# Altium PCB PCB1.PcbDoc
Units mil, origin at the board's own origin, x right, y up, seen from the top; angles counter-clockwise.
Board outline 3869.51 x 2952.96 mil, 2 copper layers (Top Layer, Bottom Layer); 113 components, 100 nets, 369 pads, 82 vias.
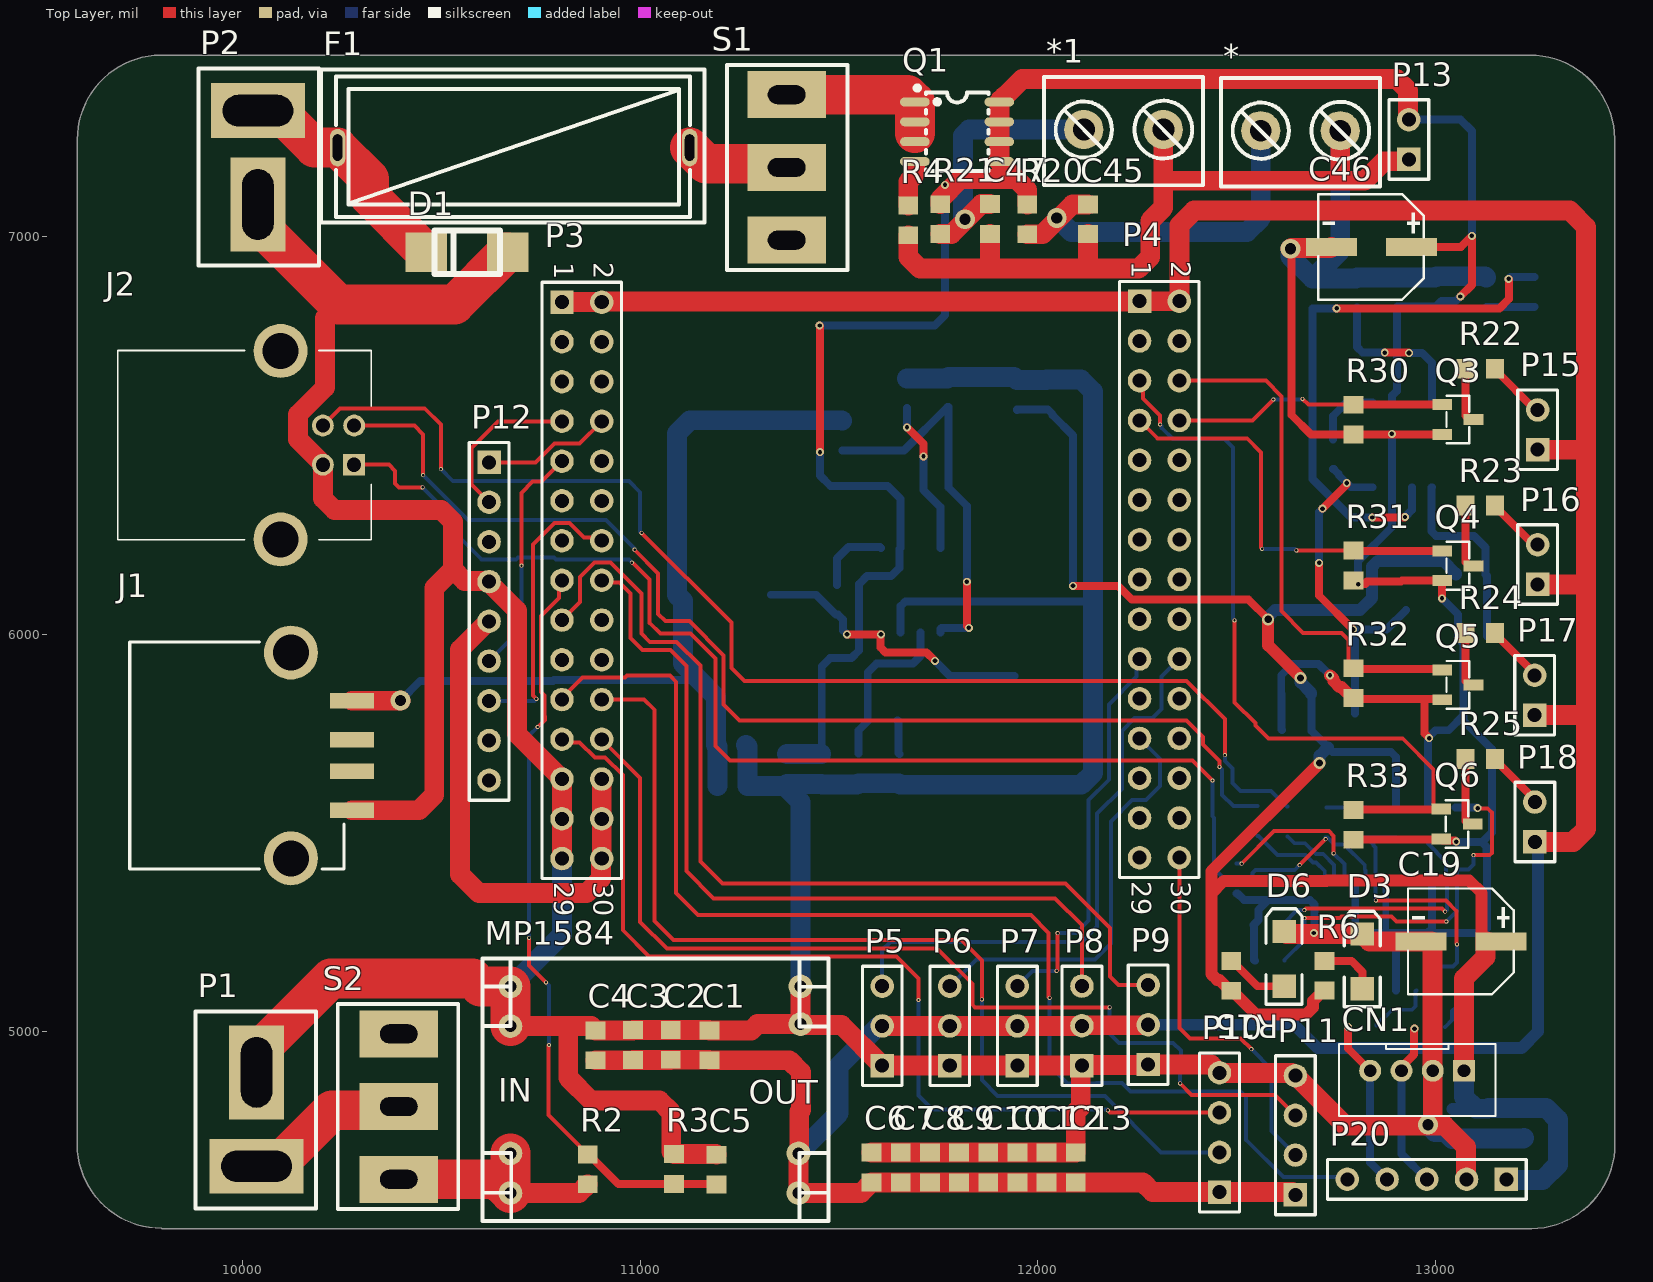
[diagram p0: Top Layer view]
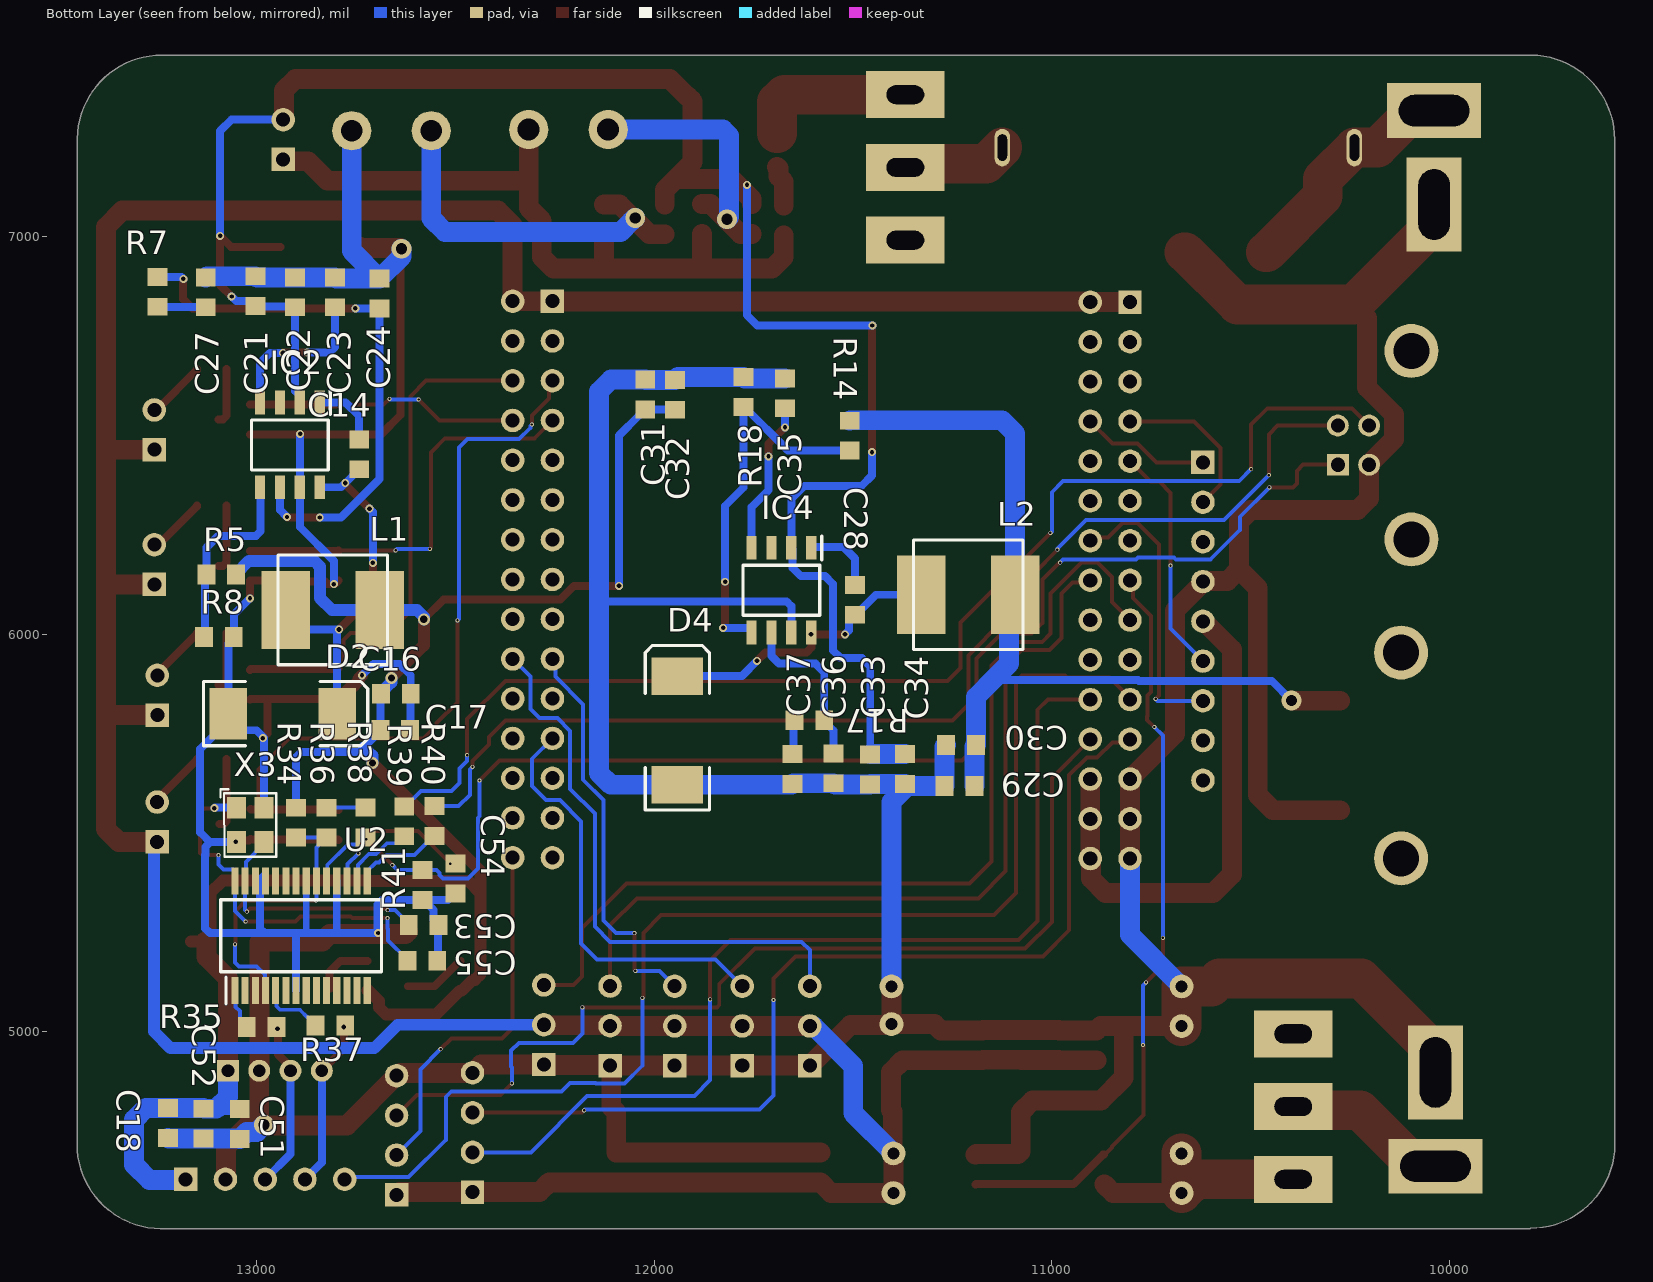
[diagram p1: Bottom Layer view, seen from below]

## Layer stack, top to bottom
Top Solder: solder mask 0.4, Solder Resist, Dk 3.5
Top Layer: signal copper 1.4
Dielectric 1: dielectric 12.6, FR-4, Dk 4.8
Bottom Layer: signal copper 1.4
Bottom Solder: solder mask 0.4, Solder Resist, Dk 3.5

## Board outline
9582.58,4715.48 9582.58,7244.12 9583.34,7244.88 cw(c9796.06,7244.88) 9793.03,7457.58 13238.21,7457.58 13238.58,7457.21 cw(c13238.58,7244.49) 13451.28,7247.52 13451.28,4718.13 13452.09,4717.32 cw(c13239.37,4717.32) 13242.4,4504.62 9796.44,4504.62 9795.28,4505.78 cw(c9795.28,4718.5)

## Design rules (kind name [scope] priority, off if disabled: settings)
Clearance [All] p1: gap=5 ignorepadtopadclearanceinfootprint=TRUE
ComponentClearance [All] p1: gap=0 collisioncheckmode=3 verticalgap=0 showdistances=FALSE
Height [All] p1: minheight=0 maxheight=10000 prefheight=500
HoleSize [All] p1: absolutevalues=TRUE maxlimit=1000 minlimit=1 maxpercent=80.000 minpercent=20.000
HoleToHoleClearance [All] p1: gap=5 allowstackedmicrovias=TRUE
MinimumSolderMaskSliver [All] p1: minsoldermaskwidth=0
PolygonConnect [All] p1: connectstyle=Relief reliefconductorwidth=10 reliefentries=4 polygonreliefangle="90 Angle" airgapwidth=10
RoutingVias [All] p1: holewidth=6 width=10 viastyle="Through Hole" minholewidth=0 minwidth=0 maxholewidth=40 maxwidth=50
SilkToSilkClearance [All] p1: silktosilkclearance=0
SilkToSolderMaskClearance [IsPad] p1: minsilkscreentomaskgap=0 clearancetoexposedcopper=TRUE
SolderMaskExpansion [All] p1: expansion=4 istentingtop=FALSE
UnRoutedNet [All] p1: checkbadconnections=TRUE
Width [All] p1: maxlimit=200 minlimit=10 preferedwidth=10
22 further rules are at their usual default settings.

## Components (designator, comment, footprint, x,y, rotation, side; value= is the part's Value field where it differs from the comment)
* "电源接线柱" 接线柱 12653.94,7266.14 r90 top
*1 "电源接线柱" 接线柱 12208.66,7268.9 r90 top
C1 "C" 0805 11173.62,4968.5 r90 top
C2 "C" 0805 11076.51,4969.68 r90 top
C3 "C" 0805 10981.89,4969.29 r90 top
C4 "C" 0805 10887.01,4968.5 r90 top
C5 "C" 0805 11191.34,4650.79 r270 top
C6 "C" 0805 11581.8,4656.3 r270 top
C7 "C" 0805 11655.15,4656.3 r270 top
C8 "C" 0805 11728.5,4656.3 r270 top
C9 "C" 0805 11801.86,4656.3 r270 top
C10 "C" 0805 11875.21,4656.3 r270 top
C11 "C" 0805 11948.57,4656.3 r270 top
C12 "C" 0805 12021.92,4656.3 r270 top
C13 "C" 0805 12095.28,4656.3 r270 top
C14 "C" 0805 12742.13,6455.51 r90 bottom
C16 "C" 0805 12652.36,5850.39 r0 bottom
C17 "C" 0805 12653.94,5759.45 r0 bottom
C18 "C" 0805 13223.23,4773.23 r90 bottom
C19 "10uF" CAP-SMD_BD6.3-L6.6-W6.6-RD 13064.96,5227.56 r0 top
C21 "C" 0805 13002.76,6861.02 r270 bottom
C22 "C" 0805 12903.54,6857.87 r270 bottom
C23 "C" 0805 12803.07,6857.87 r270 bottom
C24 "C" 0805 12690.94,6855.12 r270 bottom
C27 "C" 0805 13128.35,6857.87 r270 bottom
C28 "C" 0805 11494.49,6089.37 r90 bottom
C29 "C" 0805 11229.09,5618.23 r180 bottom
C30 "C" 0805 11225.59,5721.65 r180 bottom
C31 "C" 0805 12022.44,6601.18 r270 bottom
C32 "C" 0805 11947.24,6600 r270 bottom
C33 "C" 0805 11456.69,5662.2 r90 bottom
C34 "C" 0805 11368.5,5663.78 r90 bottom
C35 "C" 0805 11670.47,6603.94 r270 bottom
C36 "C" 0805 11548.43,5665.35 r90 bottom
C37 "C" 0805 11651.57,5663.78 r90 bottom
C45 "C" 0805 12125.98,7046.85 r90 top
C46 "10uF" CAP-SMD_BD6.3-L6.6-W6.6-RD 12838.98,6974.8 r0 top
C47 "C" 0805 11879.92,7047.64 r90 top
C51 "C" 0805 13042.52,4770.51 r90 bottom
C52 "C" 0805 13133.86,4771.26 r90 bottom
C53 "C" 0805 12577.56,5268.5 r180 bottom
C54 "C" 0805 12500,5388.19 r90 bottom
C55 "C" 0805 12580.87,5178.74 r180 bottom
CN1 "PH2.0-4P" CONN-TH_PH2.0-4P 12954.33,4901.97 r180 top
D1 "D-SS12" SMA 10557.48,6969.29 r0 top
D2 "Diode" SMC 12934.25,5800.39 r180 bottom
D3 "LED2" 3.2X1.6X1.1 12816.14,5177.17 r90 top
D4 "Diode" SMC 11941.73,5758.27 r90 bottom
D6 "LED2" 3.2X1.6X1.1 12619.68,5183.46 r90 top
F1 "Fuse transparent seat" FUSE-TH_L24.5-W9.8-P22.5 10681.1,7224.8 r0 top
IC2 "TPS54231D" SOIC127P600X175-8N 12916.54,6476.77 r270 bottom
IC4 "TPS54231D" SOIC127P600X175-8N 11679.92,6111.02 r270 bottom
J1 "A-USBA_SMT-R" AUSBASMTR 9994.88,5695.28 r270 top
J2 "USB-B-S-F-B-TH" USBBSFBTH 10279.92,6426.77 r270 top
L1 "L" L-7*7 12808.66,6061.42 r180 bottom
L2 "L" L-7*7 11209.84,6099.61 r180 bottom
MP1584 "MP1584EN_module" MP1584EN_module 10992.91,4799.21 r0 top
P1 "P" T插1 10034.25,4661.81 r90 top
P2 "P" T插1 10037.8,7317.72 r270 top
P3 "Header 15X2" HDR2X15 10802.76,6835.83 r270 top
P4 "Header 15X2" HDR2X15 12255.91,6838.19 r270 top
P5 "SERVO" HDR1X3 11608.43,4914.76 r90 top
P6 "SERVO" HDR1X3 11778.43,4914.76 r90 top
P7 "SERVO" HDR1X3 11948.43,4914.76 r90 top
P8 "SERVO" HDR1X3 12111.02,4914.96 r90 top
P9 "SERVO" HDR1X3 12277.56,4917.72 r90 top
P10 "SCI" HDR1X4 12457.05,4596.65 r90 top
P11 "IIC" HDR1X4 12648.03,4589.76 r90 top
P12 "PS2" HDR1X9 10619.29,6432.68 r270 top
P13 "Header 2" HDR1X2 12933.46,7194.88 r90 top
P15 "B_LED1" HDR1X2 13257.48,6464.57 r90 top
P16 "B_LED2" HDR1X2 13257.48,6125.59 r90 top
P17 "F_LED1" HDR1X2 13250,5796.85 r90 top
P18 "F_LED2" HDR1X2 13250.39,5477.95 r90 top
P20 "Header 5" HDR1X5 13178.74,4628.74 r180 top
Q1 "AO4411_C709889" SO-8_L4.9-W3.9-P1.27-LS5.9-BL 11796.85,7264.57 r270 top
Q3 "AO3400_C181090" SOT-23-3_L2.9-W1.3-P1.90-LS2.4-BR 13056.69,6540.55 r180 top
Q4 "AO3400_C181090" SOT-23-3_L2.9-W1.3-P1.90-LS2.4-BR 13056.69,6172.44 r180 top
Q5 "AO3400_C181090" SOT-23-3_L2.9-W1.3-P1.90-LS2.4-BR 13056.69,5872.83 r180 top
Q6 "AO3400_C181090" SOT-23-3_L2.9-W1.3-P1.90-LS2.4-BR 13054.72,5522.83 r180 top
R2 "R" 0805 10867.72,4651.57 r270 top
R3 "R" 0805 11084.25,4652.36 r270 top
R4 "R" 0805 11674.02,7038.98 r270 top
R5 "R" 0805 13086.61,6150.39 r180 bottom
R6 "R" 0805 12720.87,5138.58 r270 top
R7 "R" 0805 13249.61,6864.17 r90 bottom
R8 "R" 0805 13097.64,5992.91 r0 bottom
R14 "R" 0805 11507.87,6502.36 r90 bottom
R15 "R" 0805 12486.61,5138.19 r270 top
R17 "R" 0805 11607.09,5783.86 r180 bottom
R18 "R" 0805 11775.59,6607.48 r270 bottom
R20 "R" 0805 11973.23,7041.73 r270 top
R21 "R" 0805 11754.33,7042.13 r270 top
R22 "R" 0805 13110.63,6668.11 r180 top
R23 "R" 0805 13110.63,6324.41 r180 top
R24 "R" 0805 13110.63,6003.54 r180 top
R25 "R" 0805 13110.63,5686.61 r180 top
R30 "R" 0805 12794.09,6537.8 r270 top
R31 "R" 0805 12794.09,6170.47 r270 top
R32 "R" 0805 12794.09,5874.8 r270 top
R33 "R" 0805 12794.09,5518.11 r270 top
R34 "0R" 0805 12901.57,5528.74 r90 bottom
R35 "22R" 0805 12990,5011.81 r0 bottom
R36 "NC" 0805 12824.41,5528.74 r90 bottom
R37 "22R" 0805 12817.32,5016.14 r0 bottom
R38 "4.7K" 0805 12726.38,5529.13 r90 bottom
R39 "22R" 0805 12628.74,5531.89 r90 bottom
R40 "22R" 0805 12552.36,5532.68 r90 bottom
R41 "10K" 0805 12582.68,5372.05 r90 bottom
S1 "SWITCH" 纽子开关 11368.11,7172.8 r180 top
S2 "SWITCH" 纽子开关 10392.13,4813.78 r0 top
U2 "FT232RL" SOP65P778X200-28N 12888.19,5241.73 r90 bottom
X3 "12MHz" OSC-SMD_4P-L3.2-W2.5-BL 13016.14,5520.47 r270 bottom

## Footprints (in the part's own frame and the unit in brackets; to place one, negate y for a bottom-side part, rotate by r counter-clockwise, add the part's x,y. Pads: shape width x height; smd on the part's side, far side on the other; paste and mask are expansions set on the pad)
3.2X1.6X1.1 [mm] "SMT LED; 2 Flat Leads"
  rect 1.5x1.5 smd: 1(-1.75,0) 2(1.75,0)
  silkscreen extent -2.9,-1.15 3.2,1.15
0805 [mil]
  rect 45x50 smd: 1(-40,0) 2(35,0)
AUSBASMTR [mm]
  rect 1x2.8 smd: 1(-3.5,7.1) 2(-1,7.1) 3(1,7.1) 4(3.5,7.1)
  round 3.45 hole 2.3: MH1(-6.57,3.2) MH2(6.57,3.2)
  silkscreen extent -7.25,-7.1 7.25,6.6, body extent -7.61,-7.1 7.62,8.4, height 7.22
CAP-SMD_BD6.3-L6.6-W6.6-RD [mm]
  rect 3.26x1.15 smd: 1(2.555,0) 2(-2.555,0)
  silkscreen extent -3.39,-3.38 3.36,3.38
CONN-TH_PH2.0-4P [mm]
  rect 1.4x1.4 hole 0.813: 1(-3,0)
  round 1.4 hole 0.813: 2(-1,0) 3(1,0) 4(3,0)
  silkscreen extent -5,-1.7 5,2.9
FUSE-TH_L24.5-W9.8-P22.5 [mm]
  oval 1x2.4 hole 0.6 slot 1.68 at 90 deg: 1(-11.25,0) 2(11.25,0)
  silkscreen extent -12.3,-4.8 12.2,5
HDR1X2 [mm] "Connector; Header; 2 Position"
  rect 1.5x1.5 hole 0.9: 1(0,0)
  round 1.5 hole 0.9: 2(2.54,0)
  silkscreen extent -1.27,-1.27 3.81,1.27
HDR1X3 [mm] "Connector; Header; 3 Position"
  rect 1.5x1.5 hole 0.9: 1(0,0)
  round 1.5 hole 0.9: 2(2.54,0) 3(5.08,0)
  silkscreen extent -1.27,-1.27 6.35,1.27
HDR1X4 [mm] "Connector; Header; 4 Position"
  rect 1.5x1.5 hole 0.9: 1(0,0)
  round 1.5 hole 0.9: 2(2.54,0) 3(5.08,0) 4(7.62,0)
  silkscreen extent -1.27,-1.27 8.89,1.27
HDR1X5 [mm] "Connector; Header; 5 Position"
  rect 1.5x1.5 hole 0.9: 1(0,0)
  round 1.5 hole 0.9: 2(2.54,0) 3(5.08,0) 4(7.62,0) 5(10.16,0)
  silkscreen extent -1.27,-1.27 11.43,1.27
HDR1X9 [mm] "Connector; Header; 9 Position"
  rect 1.5x1.5 hole 0.9: 1(0,0)
  round 1.5 hole 0.9: 2(2.54,0) 3(5.08,0) 4(7.62,0) 5(10.16,0) 6(12.7,0) 7(15.24,0) 8(17.78,0) 9(20.32,0)
  silkscreen extent -1.27,-1.27 21.59,1.27
HDR2X15 [mm] "Connector; Header; 15x2 Position"
  rect 1.5x1.5 hole 0.9: 1(0,0)
  round 1.5 hole 0.9: 2(0,2.54) 3(2.54,0) 4(2.54,2.54) 5(5.08,0) 6(5.08,2.54) 7(7.62,0) 8(7.62,2.54) 9(10.16,0) 10(10.16,2.54) 11(12.7,0) 12(12.7,2.54) 13(15.24,0) 14(15.24,2.54) 15(17.78,0) 16(17.78,2.54) 17(20.32,0) 18(20.32,2.54) 19(22.86,0) 20(22.86,2.54) 21(25.4,0) 22(25.4,2.54) 23(27.94,0) 24(27.94,2.54) 25(30.48,0) 26(30.48,2.54) 27(33.02,0) 28(33.02,2.54) 29(35.56,0) 30(35.56,2.54)
  silkscreen extent -1.27,-1.27 36.83,3.81
L-7*7 [mm]
  rect 3.1x5 smd: 1(-3,0) 2(3,0)
  silkscreen extent -3.5,-3.5 3.5,3.5, body extent -3.65,-3.65 3.65,3.65, height 4.5
MP1584EN_module [mil]
  round 60 hole 30: 1(-320,315) 2(-320,215) 3(-320,-105) 4(-320,-205) 5(405,-205) 6(405,-105) 7(410,220) 8(410,315)
  silkscreen extent -390,-275 480,385
OSC-SMD_4P-L3.2-W2.5-BL [mm]
  rect 1.4x1.2 smd: 1(-1.1,-0.875) 2(1.1,-0.875) 3(1.1,0.875) 4(-1.1,0.875)
  silkscreen extent -2.29,-1.9 2.03,1.65
SMA [mil]
  rect 105x100 smd: 1(109,-8) 2(-96,-8)
  silkscreen extent -76,-63 89,47
SMC [mm] "DO-214-AB/SMC; 2 C-Bend Leads; Body 7.9 x 5.9 mm, inc. leads (LxW)"
  rect 2.4x3.3 smd: 1(-3.475,0) 2(3.475,0)
  silkscreen extent -5.07,-2.05 5.43,2.05
SO-8_L4.9-W3.9-P1.27-LS5.9-BL [mil]
  oval 22.6x74.33 smd: 1(-75,-106.26) 2(-25,-106.26) 3(25,-106.26) 4(75,-106.26) 5(75,106.26) 6(25,106.26) 7(-25,106.26) 8(-75,106.26)
  silkscreen extent -116,-106 98,79
SOIC127P600X175-8N [mm]
  rect 1.528x0.65 smd: 1(-2.711,1.905) 2(-2.711,0.635) 3(-2.711,-0.635) 4(-2.711,-1.905) 5(2.711,-1.905) 6(2.711,-0.635) 7(2.711,0.635) 8(2.711,1.905)
  silkscreen extent -3.47,-2.45 1.6,2.58, body extent -3.01,-2.45 3.01,2.45, height 1.63
SOP65P778X200-28N [mm]
  rect 1.7x0.45 smd: 1(-3.5,4.225) 2(-3.5,3.575) 3(-3.5,2.925) 4(-3.5,2.275) 5(-3.5,1.625) 6(-3.5,0.975) 7(-3.5,0.325) 8(-3.5,-0.325) 9(-3.5,-0.975) 10(-3.5,-1.625) 11(-3.5,-2.275) 12(-3.5,-2.925) 13(-3.5,-3.575) 14(-3.5,-4.225) 15(3.5,-4.225) 16(3.5,-3.575) 17(3.5,-2.925) 18(3.5,-2.275) 19(3.5,-1.625) 20(3.5,-0.975) 21(3.5,-0.325) 22(3.5,0.325) 23(3.5,0.975) 24(3.5,1.625) 25(3.5,2.275) 26(3.5,2.925) 27(3.5,3.575) 28(3.5,4.225)
  silkscreen extent -4.35,-5.14 2.3,5.14, body extent -3.89,-5.14 3.89,5.14, height 2
SOT-23-3_L2.9-W1.3-P1.90-LS2.4-BR [mm]
  rect 1.25x0.7 smd: 1(1,-0.95) 2(1,0.95) 3(-1,0)
  silkscreen extent -0.73,-1.53 0.73,1.53
T插1 [mm]
  rect 3.5x6 hole 2 slot 4.5 at 90 deg: 1(0,0)
  rect 6x3.5 hole 2 slot 4.5 at 0 deg: 2(6,0)
  silkscreen extent -2.7,-3.8 9.9,3.9
USBBSFBTH [mm]
  rect 1.4x1.4 hole 0.9: 1(0,0)
  round 1.4 hole 0.9: 2(-2.5,0) 3(-2.5,-2) 4(0,-2)
  round 3.45 hole 2.3: MH1(4.77,-4.7) MH2(-7.27,-4.7)
  silkscreen extent -7.3,-15.1 4.8,1.1, body extent -8.31,-15.1 5.82,1.1, height 11.05
接线柱 [mm]
  round 2.5 hole 1.4: 1(0.025,2.362) 2(0.025,-2.718)
  silkscreen extent -3.53,-5.26 3.4,4.9
纽子开关 [mm]
  rect 5x3 hole 1.2 slot 2.4 at 0 deg: 1(0,-4.699) 2(0,-0.051) 3(0,4.597)
  silkscreen extent -3.9,-6.6 3.8,6.5, body extent -5.11,-6.41 5.05,6.31, height 28.55

## Part data
C19 C46: BOM_JLCPCB Part Class="Extended Part", BOM_Manufacturer=CapXon, BOM_Manufacturer Part=ZV100M050E055R, BOM_Supplier=LCSC, BOM_Supplier Part=C65228, nameAlias=Capacitance, spicePre=C, spiceSymbolName=ZV100M050E055R
CN1: BOM_JLCPCB Part Class="Extended Part", BOM_Manufacturer=CAX(创都), BOM_Manufacturer Part=PH2.0-4P, BOM_Supplier=LCSC, BOM_Supplier Part=C722763, Contributor=LCSC, spicePre=C, spiceSymbolName=PH2.0-4P
D2 D4: "Default Diode", Code_JEDEC=DO-214-AB, LatestRevisionDate=17-Jul-2002, LatestRevisionNote="Re-released for DXP Platform.", PackageDescription="DO-214-AB/SMC; 2 C-Bend Leads; Body 7.9 x 5.9 mm, inc. leads (LxW)", PackageReference=SMC, PackageVersion=Sep-1996, Published=8-Jun-2000, Publisher="Altium Limited"
D3 D6: "Typical RED, GREEN, YELLOW, AMBER GaAs LED", LatestRevisionDate=17-Jul-2002, LatestRevisionNote="Re-released for DXP Platform.", PackageDescription="SM LED; 2 Flat Leads", PackageReference=3.2X1.6X1.1, PackageVersion=Feb-2002, Published=8-Jun-2000, Publisher="Altium Limited"
F1: BOM_JLCPCB Part Class="Extended Part", BOM_Manufacturer=ReliaPro, BOM_Manufacturer Part="Fuse transparent seat", BOM_Supplier=LCSC, BOM_Supplier Part=C58066, spicePre=F, spiceSymbolName="Fuse transparent seat"
IC2 IC4: "Integrated Circuit", Manufacturer_Name="Texas Instruments", Mouser Part Number=595-TPS54231D, Arrow Part Number=TPS54231D, Arrow Price/Stock=https://www.arrow.com/en/products/tps54231d/texas-instruments?region=nac, Datasheet Link=http://www.ti.com/lit/ds/symlink/tps54231.pdf, Height=1.75mm, Manufacturer_Part_Number=TPS54231D, Mouser Price/Stock=https://www.mouser.co.uk/ProductDetail/Texas-Instruments/TPS54231D?qs=XGzIaZb%2FFYKgSi6ISxIl1g%3D%3D
J1: "Connector", Manufacturer_Name="ASSMANN WSW components GmbH", Manufacturer_Part_Number=A-USBA/SMT-R, Datasheet Link=https://4donline.ihs.com/images/VipMasterIC/IC/ASMN/ASMN-S-A0006023560/ASMN-S-A0006023560-1.pdf?hkey=EF798316E3902B6ED9A73243A3159BB0, Height=7.12mm
J2: "Connector", Manufacturer_Name=SAMTEC, Mouser Part Number=200-USBBSFBTH, Arrow Part Number=USB-B-S-F-B-TH, Arrow Price/Stock=https://www.arrow.com/en/products/usb-b-s-f-b-th/samtec, Datasheet Link=http://suddendocs.samtec.com/prints/usb-b-s-x-x-th-x-xx-mkt.pdf, Height=10.95mm, Manufacturer_Part_Number=USB-B-S-F-B-TH, Mouser Price/Stock=https://www.mouser.co.uk/ProductDetail/Samtec/USB-B-S-F-B-TH?qs=sVTw84TxZehrVm561Fh59Q%3D%3D
P1 P2: library part CON-T插
P3 P4: "Header, 15-Pin, Dual row", LatestRevisionDate=17-Jul-2002, LatestRevisionNote="Re-released for DXP Platform.", Publisher="Altium Limited"
P5 P6 P7 P8 P9: library part "Header 3", "Header, 3-Pin", LatestRevisionDate=17-Jul-2002, LatestRevisionNote="Re-released for DXP Platform.", Publisher="Altium Limited"
P10 P11: library part "Header 4", "Header, 4-Pin", LatestRevisionDate=17-Jul-2002, LatestRevisionNote="Re-released for DXP Platform.", Publisher="Altium Limited"
P12: library part "Header 9", "Header, 9-Pin", LatestRevisionDate=17-Jul-2002, LatestRevisionNote="Re-released for DXP Platform.", Publisher="Altium Limited"
P13: "Header, 2-Pin", LatestRevisionDate=17-Jul-2002, LatestRevisionNote="Re-released for DXP Platform.", Publisher="Altium Limited"
P15 P16 P17 P18: library part "Header 2", "Header, 2-Pin", LatestRevisionDate=17-Jul-2002, LatestRevisionNote="Re-released for DXP Platform.", Publisher="Altium Limited"
P20: "Header, 5-Pin", LatestRevisionDate=17-Jul-2002, LatestRevisionNote="Re-released for DXP Platform.", Publisher="Altium Limited"
Q1: BOM_JLCPCB Part Class="Extended Part", BOM_Manufacturer="VBsemi Elec", BOM_Manufacturer Part=AO4411, BOM_Supplier=LCSC, BOM_Supplier Part=C709889, Contributor=LCSC, spicePre=Q, spiceSymbolName=AO4411_C709889
Q3 Q4 Q5 Q6: BOM_JLCPCB Part Class="Extended Part", BOM_Manufacturer=Hottech, BOM_Manufacturer Part=AO3400, Add into BOM=Yes, BOM_Supplier=LCSC, BOM_Supplier Part=C181090, Contributor=LCSC, libConvert=Yes, spicePre=Q, spiceSymbolName=AO3400_C181090
R34 R35 R36 R37 R38 R39 R40 R41: library part R
S1 S2: library part SW-钮子开关
U2: "Integrated Circuit", Manufacturer_Name="FTDI Chip", Arrow Part Number=FT232RL, Arrow Price/Stock=https://www.arrow.com/en/products/ft232rl/ftdi-chip, Datasheet Link=http://www.ftdichip.com/Support/Documents/DataSheets/ICs/DS_FT232R.pdf, Height=2mm, Manufacturer_Part_Number=FT232RL
X3: BOM_JLCPCB Part Class="Extended Part", BOM_Manufacturer="ZheJiang East Crystal Elec", BOM_Manufacturer Part=M12000J134, BOM_Supplier=LCSC, BOM_Supplier Part=C258939, Contributor=LCSC, nameAlias=Frequency, spicePre=X, spiceSymbolName=M12000J134
C1 C2 C3 C4 C5 C6 C7 C8 C9 C10 C11 C12 C13 C14 C16 C17 C18 C21 C22 C23 C24 C27 C28 C29 C30 C31 C32 C33 C34 C35 C36 C37 C45 C47 C51 C52 C53 C54 C55: LatestRevisionDate=17-Jul-2002, LatestRevisionNote="Re-released for DXP Platform.", PackageDescription="Radial Cap, Thru-Hole; 2 Leads; 0.3 in Pin Spacing", PackageReference=RAD-0.3, Published=8-Jun-2000, Publisher="Altium Limited"

## Via types
v1: diameter 10, hole 6, Top Layer to Bottom Layer, 41 vias
v2: diameter 20, hole 11, Top Layer to Bottom Layer, 20 vias
v3: diameter 20, hole 12, Top Layer to Bottom Layer, 13 vias
v4: diameter 50, hole 28, Top Layer to Bottom Layer, 5 vias
v5: diameter 30, hole 18, Top Layer to Bottom Layer, 3 vias

## Nets (pads, with @x,y where several pads share a name; then routed paths per layer and width w, separated by ;. In a path a pad name is that pad's centre, name@x,y a point inside that pad or via, vN(x,y) a via of type N, cw(c..) or ccw(c..) an arc to the next point about the centre after c; other vN are vias at no path point)
3V3: P3.26 P3.28 P3.30 P12.5 | length 1308.6
  Top Layer w50: P12.5 10616.84,6032.68 10546.37,5962.2 10546.37,5396.15 10593.7,5348.82 10864.17,5348.82 10901.02,5385.67 10901.02,5434.09 P3.30 P3.28 P3.26
BAT: C21.2 C22.2 C33.2 C34.2 C46.1 IC2.2 IC4.2 P13.2 Q1.5 Q1.6 Q1.7 Q1.8 R20.1 R21.1 | length 4967.6
  Top Layer w20: v2(11451.18,6777.17) 11451.97,6776.38 v2(11451.97,6458.27) ; C46.1 13064.17,6974.8 v2(13092.13,7002.76) 13092.13,6879.21 v2(13062.99,6850.08)
  Top Layer w50: R21.1 11754.33,7094.88 11804.82,7145.37 11945.77,7145.37 ; R20.1 11973.23,7117.91 11945.77,7145.37 ; P13.2 12931.73,7296.61 12931.73,7367.95 12902.44,7397.24 11960.79,7397.24 11916.81,7353.27 11915.28,7353.27 11903.11,7341.1 Q1.8 Q1.7 Q1.6 Q1.5 11903.11,7188.03 11945.77,7145.37
  Bottom Layer w20: v2(11451.18,6777.17) 11740.65,6777.17 11766.42,6802.94 v2(11766.42,7131.1) ; v2(11451.97,6458.27) 11451.97,6399.61 11477.95,6373.62 11622.05,6373.62 11654.92,6340.75 IC4.2 11652.13,6214.96 11652.13,6167.48 11631.1,6146.46 11570.47,6146.46 11550.39,6126.38 11550.39,5959.84 11531.1,5940.55 11477.56,5940.55 11456.3,5919.29 11456.3,5699.96 C33.2@11455.12,5698.78 ; IC2.2 12891.54,6600.79 12903.54,6612.8 C22.2 12905.12,6824.45 13001.18,6824.45 C21.2 13015.26,6838.52 13051.44,6838.52 v2(13062.99,6850.08) ; P13.2 12934.25,7295.67 13062.99,7295.67 13092.13,7266.54 v2(13092.13,7002.76)
  Bottom Layer w50: C34.2 C33.2@11455.12,5698.78
CANH: P4.17
CANL: P4.16
GND: *1.2 *.2 C1.2 C2.2 C3.2 C4.2 C5.1 C6.1 C7.1 C8.1 C9.1 C10.1 C11.1 C12.1 C13.1 C16.1 C17.1 C18.1 C19.2 C21.1 C22.1 C23.1 C24.1 C27.1 C29.1 C30.1 C31.1 C32.1 C33.1 C34.1 C35.1 C36.1 C37.1 C45.1 C46.2 C47.1 C51.1 C52.1 C53.2 C54.1 C55.2 CN1.2 D1.1 D2.1 D3.2 D4.1 D6.2 IC2.7 IC4.7 J1.4 J2.4 MP1584.1 MP1584.2 MP1584.7 MP1584.8 P1.2 P2.2 P3.25 P3.27 P3.29 P5.1 P6.1 P7.1 P8.1 P9.1 P10.4 P11.4 P12.4 P13.1 P20.2 Q3.2 Q4.2 Q5.2 Q6.2 R3.1 R4.2 R8.1 R18.1 R30.2 R31.2 R32.2 R33.2 R41.1 U2.7 U2.18 U2.21 U2.25 U2.26 X3.2 X3.4 | length 21704.1
  Top Layer w20: v4(12635.83,6970.08) 12637.8,6968.11 12637.8,6552.36 12687.36,6502.8 R30.2 12794.27,6502.97 13017.15,6502.97 Q3.2 ; R33.2 12795.26,5484.27 13014.19,5484.27 Q6.2 13019.13,5481.65 13049.45,5481.65 v2(13052.76,5478.35) ; R32.2 12796.28,5837.62 12973.23,5837.62 ; R31.2 12803.2,6126.37 v2(12805.75,6126.37) 12824.72,6126.37 ; 12827.57,6132.84 12913.94,6132.84 12916.35,6135.26 13016.75,6135.26 13016.93,6135.08 v2(13016.93,6090.55) ; v2(12984.65,5738.98) 12973.23,5750.39 12973.23,5837.62 ; Q5.2 13015.14,5837.62 12973.23,5837.62
  Top Layer w30: v2(12735.04,5896.85) 12744.09,5887.8 12744.09,5881.95 12758.74,5867.3 12764.09,5867.3 12791.59,5839.8 R32.2
  Top Layer w50: 10240.16,6829.92 10206.3,6796.06 10206.3,6620.73 10138.62,6553.05 10138.62,6490.72 10201.18,6428.16 J2.4 10201.18,6341.89 10230.47,6312.6 10499.06,6312.6 10528.35,6283.31 10528.35,6163.7 ; J1.4 10442.91,5557.48 10481.5,5596.06 10481.5,6116.85 10528.35,6163.7 ; MP1584.2 10818.5,5014.21 ; P3.29 P3.27 P3.25 10689.61,5748.98 10689.61,6059.91 10619.29,6130.23 P12.4 10617.56,6134.41 10557.64,6134.41 10528.35,6163.7 ; C5.1 11189.76,4692.36 R3.1 11077.56,4699.06 11077.56,4797.48 11048.27,4826.77 10875.98,4826.77 10818.5,4884.25 10818.5,5014.21 ; MP1584.8 MP1584.7 ; C6.1 C7.1 C8.1 C9.1 C10.1 C11.1 C12.1 C13.1 12095.28,4797.76 12107.95,4810.43 12107.95,4911.89 P8.1@12110.93,4914.86 ; R4.2 11674.02,6949.37 11703.31,6920.08 11880.32,6920.08 ; C47.1 11879.92,6920.47 11880.32,6920.08 ; C45.1 12125.98,6920.47 12126.38,6920.08 ; *1.2 12315.66,7141.34 ; D6.2 12625.98,5246.06 D3.2 12834.65,5227.56 C19.2 12990.36,5227.56 12992.72,5225.2 12992.72,4902.95 CN1.2 12993.7,4765.75 v4@12992.52,4764.57 ; v4(12635.83,6970.08) 12638.19,6972.44 12736.02,6972.44 C46.2 ; *.2 12760.94,7142.04 12760.24,7141.34 ; P13.1 12928.94,7190.35 12871.06,7190.35 12822.05,7141.34 12760.24,7141.34 ; P20.2 13077.01,4630.47 13077.01,4710.39 13022.83,4764.57 v4@12992.52,4764.57 ; 10818.5,5014.21 10876.3,5014.21 C4.2 10981.1,5003.5 C3.2 11076.12,5004.29 C2.2 11172.44,5004.68 C1.2 11279.06,5003.5 11294.77,5019.21 MP1584.7 ; MP1584.7 11404.83,5017.3 11505.89,5017.3 P5.1 P6.1 P7.1 11948.52,4914.86 P8.1@12110.93,4914.86 ; 11880.32,6920.08 12126.38,6920.08 ; P8.1@12110.93,4914.86 P8.1 12112.4,4916.34 12276.18,4916.34 P9.1 12435.98,4917.72 P10.4 12638.69,4896.65 12645.58,4889.76 P11.4 12773.23,4764.57 v4@12992.52,4764.57 ; 12126.38,6920.08 12253.39,6920.08 12282.68,6949.37 12282.68,7040.36 12315.66,7073.35 12315.66,7141.34 ; 12315.66,7141.34 12760.24,7141.34
  Top Layer w100: P1.2 10034.25,4947.24 10221.26,5134.25 10577.56,5134.25 10597.6,5114.21 MP1584.1 MP1584.2 ; P2.2 10037.8,7032.28 10240.16,6829.92 10532.61,6829.92 10663.98,6961.29 D1.1
  Bottom Layer w17: 12875.39,5250.59 U2.21
  Bottom Layer w20: IC4.7 11654.92,6070.96 11666.64,6082.68 12137.8,6082.68 12138.58,6083.46 ; C35.1 C35.1@11672.24,6645.71 ; C54.1 12502.5,5348.19 12518.64,5332.05 R41.1@12580.18,5332.05 ; C55.2 12544.21,5180.39 12544.21,5266.85 C53.2 12555.06,5281 12555.06,5306.93 R41.1@12580.18,5332.05 ; C17.1 12613.15,5760.24 12613.15,5849.61 C16.1 12612.36,5897.01 12640.91,5925.55 12706.34,5925.55 v2(12735.04,5896.85) ; U2.18 12798.62,5249.8 12797.24,5248.43 ; v2(12805.75,6126.37) 12805.75,6184.7 12891.54,6270.48 IC2.7 12891.54,6503.35 v2(12890.55,6504.33) ; 12875.39,5250.59 12873.23,5248.43 ; U2.7 12900.98,5247.83 12900.39,5248.43 ; X3.4 12981.69,5739.56 13000.79,5758.66 13033.82,5758.66 D2.1@13071.06,5795.91 ; U2.26@13000.08,5379.53 12995.28,5379.53 12981.02,5393.78 12981.02,5388.27 12992.13,5377.17 12992.13,5260.14 12980.41,5248.43 ; v2(13016.93,6090.55) 13057.64,6049.84 R8.1 13057.64,5990.41 13071.06,5976.99 D2.1 D2.1@13071.06,5795.91 ; X3.2 13117.42,5477.17 ; R41.1@12580.18,5332.05 R41.1 12684.35,5332.05 12696.06,5320.33 12696.06,5250 v2(12694.49,5248.43) 12797.24,5248.43 ; 12797.24,5248.43 12873.23,5248.43 ; 12873.23,5248.43 12900.39,5248.43 ; 12900.39,5248.43 12980.41,5248.43 ; 12980.41,5248.43 13117.81,5248.43 13129.53,5260.14 13129.53,5444.88 13129.13,5445.28 13129.13,5465.45 13117.42,5477.17 ; D2.1@13071.06,5795.91 13071.06,5782.68 13142.13,5711.61 13142.13,5501.87 13117.42,5477.17
  Bottom Layer w50: MP1584.1 10802.76,5244.06 P3.29 ; C30.1 11269.09,5718.15 C29.1 C34.1@11362.95,5618.23 ; MP1584.8 11402.91,5578.27 C34.1@11362.95,5618.23 ; C35.1 11772.05,6643.94 R18.1 11939.76,6647.48 C32.1 12021.26,6640 C31.1 12108.43,6641.18 12138.58,6611.02 12138.58,6083.46 12138.58,5650.75 12109.29,5621.46 D4.1 11653.9,5621.46 C37.1 11650,5625.35 C36.1 11545.28,5622.2 C33.1 11455.12,5623.78 C34.1 C34.1@11362.95,5618.23 ; v4(12635.83,6970.08) 12635.83,6950.24 C24.1 ; *.2 12760.94,6965.11 C24.1 ; v4(12981.5,4766.14) 12999.63,4748.01 13025.02,4748.01 C51.1 13043.27,4731.26 C52.1 13221.26,4731.26 C18.1 ; C27.1 13125.2,6901.02 C21.1 12999.61,6897.87 C22.1 C23.1 12800.32,6895.12 C24.1
Net*1_1: *1.1 C47.2 R21.2 | length 679.7
  Top Layer w50: R21.2 11782.41,7007.13 11857.92,7082.64 C47.2
  Bottom Layer w50: v4(11816.93,7044.49) 11811.42,7050 11811.42,7254.33 11826.98,7269.9 *1.1
Net*_1: *.1 C45.2 R20.2 | length 946.5
  Top Layer w50: R20.2 12012.05,7006.73 12087.17,7081.85 C45.2
  Bottom Layer w50: v4(12047.64,7047.64) 12048.82,7047.64 12057.93,7038.53 12084.25,7012.2 12526.38,7012.2 12560.94,7046.76 *.1
NetC14_1: C14.1 D2.2 IC2.8 L1.1 | length 920.1
  Top Layer w20: v3(12707.87,6179.84) 12707.87,6097.24 v3(12792.91,6012.2) ; v3(12716.54,6316.14) 12777.17,6376.77 v3(12777.17,6380.71)
  Bottom Layer w20: v3(12707.87,6179.84) 12707.87,6307.48 v3(12716.54,6316.14) ; C14.1 12744.63,6415.51 12757.13,6403.01 12757.13,6400.51 12787.6,6370.04 IC2.8 ; D2.2 12797.44,6007.68 v3(12792.91,6012.2) 12877.56,6012.2 L1.1
NetC14_2: C14.2 IC2.1 | length 172.1
  Bottom Layer w20: C14.2 12742.13,6548.82 12776.81,6583.5 IC2.1
NetC23_2: C23.2 IC2.4 | length 404.6
  Top Layer w20: v3(12872.83,6708.66) 12933.07,6708.66 v3(12933.86,6707.87)
  Bottom Layer w20: C23.2 12803.07,6722.91 12817.32,6708.66 v3(12872.83,6708.66) ; v3(12933.86,6707.87) 12966.93,6707.87 12991.54,6683.27 IC2.4
NetC24_2: C24.2 IC2.6 R7.2 | length 1406.7
  Top Layer w20: v2(12751.97,6820.08) 13161.42,6820.08 13185.43,6844.09 13185.43,6893.7 v2(13184.65,6894.49) ; v2(12841.34,6294.09) 12922.44,6294.09 v2(12923.62,6295.28)
  Bottom Layer w20: v2(12841.34,6294.09) 12787.76,6294.09 12690.94,6390.91 C24.2 v2@12751.93,6820.12 ; v2(12923.62,6295.28) 12941.54,6313.19 IC2.6 ; v2(13184.65,6894.49) 13189.33,6899.17 R7.2 ; v2@12751.93,6820.12 v2(12751.97,6820.08)
NetC27_2: C27.2 R7.1 | length 121.8
  Bottom Layer w20: C27.2 13129,6823.52 13248.96,6823.52 R7.1
NetC28_1: C28.1 D4.2 IC4.8 L2.1 | length 734.9
  Top Layer w20: v3(11519.68,6000) v3(11605.12,6000) 11603.94,5998.82 11603.94,5967.32 11616.93,5954.33 11720.08,5954.33 v3(11740.94,5933.46)
  Bottom Layer w20: L2.1 11441.75,6099.61 11491.99,6049.37 C28.1 11496.99,6049.37 11509.49,6036.87 11509.49,6010.2 v3(11519.68,6000) ; v3(11740.94,5933.46) 11779.33,5895.08 D4.2
NetC28_2: C28.2 IC4.1 | length 189.5
  Bottom Layer w20: C28.2 11494.49,6190.55 11523.62,6219.69 11602.99,6219.69 IC4.1
NetC35_2: C35.2 IC4.4 | length 386.2
  Top Layer w20: v2(11670.87,6520.87) 11712.2,6479.53 v2(11712.2,6447.64)
  Bottom Layer w20: C35.2 11670.47,6521.26 v2(11670.87,6520.87) ; v2(11712.2,6447.64) 11712.2,6362.7 11754.92,6319.98 IC4.4
NetC36_2: C36.2 IC4.6 R17.2 | length 422.3
  Bottom Layer w20: C36.2 11548.43,5757.7 11572.09,5781.36 R17.2 11572.09,5903.98 11594.49,5926.38 11685.83,5926.38 11704.92,5945.47 IC4.6
NetC37_2: C37.2 R17.1 | length 86.9
  Bottom Layer w20: R17.1 11649.33,5781.61 11649.33,5701.02 C37.2
NetC54_2: C54.2 U2.17 | length 408
  Top Layer w10: v1(12512.99,5423.23) 12594.41,5504.65 12732.3,5504.65 12744.02,5492.93 v1(12744.04,5449.16)
  Bottom Layer w10: C54.2 C54.2 v1(12512.99,5423.23) ; v1(12744.04,5449.16) 12771.3,5421.9 12771.3,5381.26 U2.17
NetD3_1: D3.1 R6.1 | length 150.4
  Top Layer w20: R6.1 12789.13,5178.58 12816.93,5150.79 12816.93,5109.06 D3.1
NetD6_1: D6.1 R15.1 | length 159.4
  Top Layer w20: R15.1 12489.11,5178.19 12552.74,5114.57 D6.1
NetF1_2: F1.2 S1.2 | length 264.8
  Top Layer w100: F1.2 11164.96,7183.86 11359.06,7183.86 S1.2
NetIC2_5: IC2.5 R5.1 R8.2 | length 492.3
  Bottom Layer w20: IC2.5 12990.55,6369.06 12990.55,6259.35 13002.27,6247.64 13097.64,6247.64 13126.61,6218.66 R5.1 13129.63,6147.38 13129.63,5995.93 R8.2
NetIC4_5: IC4.5 R14.1 R18.2 | length 972.4
  Top Layer w20: v2(11821.26,6132.28) 11821.26,6021.26 v2(11826.38,6016.14)
  Bottom Layer w20: R14.1 11662.97,6462.36 11773.09,6572.48 R18.2 11775.59,6368.97 11821.26,6323.3 v2(11821.26,6132.28) ; IC4.5 11754.92,6013.35 11757.72,6016.14 v2(11826.38,6016.14)
NetJ2_1: J2.1 R38.1 R41.2 U2.19 | length 3445.1
  Top Layer w10: J2.1 10367.32,6426.77 10382.68,6411.42 10382.68,6379.92 10392.91,6369.69 v1(10452.36,6369.69) ; v1@10982.28,6178.74 11022.83,6138.19 11022.83,6029.13 11050.39,6001.57 11126.38,6001.57 11188.98,5938.98 11188.98,5718.9 11225.16,5682.72 12388.94,5682.72 v1(12439.37,5632.28) ; v1(12658.66,5419.29) v1(12724.02,5484.65)
  Bottom Layer w10: v1(10452.36,6369.69) 10526.6,6295.44 10526.6,6262.39 10600.85,6188.15 10687.66,6188.15 10692.5,6192.99 10782.62,6192.99 10787.66,6187.95 10971.1,6187.95 v1(10978.74,6180.31) ; v1(12439.37,5632.28) 12439.37,5542.52 12443.7,5538.19 12443.7,5410.77 12468.79,5385.69 12531.21,5385.69 12540,5394.48 12540,5399.84 12547.2,5407.05 R41.2 12646.42,5407.05 v1(12658.66,5419.29) ; R38.1@12723.88,5489.13 12728.88,5489.13 12746.38,5471.63 12770.05,5471.63 12822.48,5419.21 12822.48,5407.99 12824.21,5406.26 U2.19
NetJ2_2: J2.2 R40.2 | length 2920.7
  Top Layer w10: J2.2 10431.5,6525.2 10453.54,6503.15 v1(10453.54,6400.39) ; v1@10985.24,6212.8 11044.88,6153.15 11044.88,6051.57 11063.39,6033.07 11123.17,6033.07 11208.98,5947.26 11208.98,5822.91 11249.17,5782.72 12374.35,5782.72 12415.72,5741.35 12415.72,5722.53 12457.09,5681.16 v1(12457.09,5666.54)
  Bottom Layer w10: v1(10453.54,6400.39) 10565.79,6288.15 10913.4,6288.15 10985.43,6216.12 v1(10985.43,6212.99) ; v1(12457.09,5666.54) 12463.78,5659.84 12463.78,5595.67 12491.77,5567.68 R40.2
NetJ2_3: J2.3 R39.2 | length 3132.9
  Top Layer w10: J2.3 10244.09,6568.11 10457.48,6568.11 10498.03,6527.56 v1(10498.03,6415.75) ; v1(11003.15,6255.51) 11228.98,6029.69 11228.98,5915.51 11261.77,5882.72 12374.35,5882.72 12470.47,5786.59 v1(12470.47,5696.06)
  Bottom Layer w10: v1(10498.03,6415.75) 10527.95,6385.83 10971.26,6385.83 10999.61,6357.48 10999.61,6259.06 v1(11003.15,6255.51) ; v1(12470.47,5696.06) 12470.47,5681.43 12489.96,5661.95 12489.96,5625.79 12509.45,5606.3 12586.83,5606.3 12626.24,5566.89 R39.2
NetP1_1: P1.1 S2.2 | length 420
  Top Layer w100: P1.1 10083.46,4661.81 10224.38,4802.72 10383.07,4802.72 S2.2
NetP15_2: P15.2 R22.1 | length 151.2
  Top Layer w20: R22.1 13150.63,6665.61 13251.67,6564.57 P15.2
NetP16_2: P16.2 R23.1 | length 149.2
  Top Layer w20: R23.1 13150.63,6321.91 13246.95,6225.59 P16.2
NetP17_2: P17.2 R24.1 | length 147.9
  Top Layer w20: R24.1 13150.63,6001.04 13250,5901.67 P17.2
NetP18_2: P18.2 R25.1 | length 150
  Top Layer w20: R25.1 13150.63,5684.11 13250.39,5584.35 P18.2
NetQ1_1: Q1.1 Q1.2 Q1.3 S1.1 | length 409
  Top Layer w100: S1.1 11672.35,7357.8 Q1.1 11690.94,7339.21 11690.94,7261.22 11690.59,7260.87
NetQ1_4: Q1.4 R4.1 | length 103.8
  Top Layer w50: R4.1 11674.02,7138.58 11687.4,7151.97 11687.4,7172.68 11690.59,7175.87
NetQ3_3: Q3.3 R22.2 | length 142.4
  Top Layer w20: R22.2 13075.63,6550.16 13085.23,6540.55 Q3.3
NetQ4_3: Q4.3 R23.2 | length 166.8
  Top Layer w20: R23.2 13075.63,6182.04 13085.23,6172.44 Q4.3
NetQ5_3: Q5.3 R24.2 | length 145.5
  Top Layer w20: R24.2 13075.63,5882.44 13085.23,5872.83 Q5.3
NetQ6_3: Q6.3 R25.2 | length 177.8
  Top Layer w20: R25.2 13075.63,5530.47 13083.26,5522.83 Q6.3
NetR34_1: R34.1 R36.1 U2.4 U2.20 | length 717.2
  Top Layer w10: v1(12850.39,5330.59) 13026.5,5330.59 13052.76,5304.33 13052.76,5222.05 v1(13054.72,5220.08)
  Bottom Layer w10: R36.1 R36.1@12826.91,5488.74 ; v1(12850.39,5330.59) 12849.8,5331.18 12849.8,5463.35 12844.41,5468.74 12844.41,5471.24 R36.1@12826.91,5488.74 ; R34.1 R36.1@12826.91,5488.74 ; U2.4 12979.49,5105.67 12979.49,5143.61 13000.44,5164.57 13044.49,5164.57 13054.72,5174.8 v1(13054.72,5220.08)
NetR35_2: R35.2 U2.1 | length 104.4
  Bottom Layer w10: R35.2 13042.5,5029.31 13042.5,5051.81 13052.8,5062.11 13052.8,5102.2 U2.1
NetR36_2: R36.2 R38.2 | length 98.2
  Bottom Layer w10: R38.2 12824.02,5564.13 R36.2
NetR37_2: R37.2 U2.5 | length 159.9
  Bottom Layer w10: R37.2 12852.32,5018.64 12869.82,5036.14 12872.32,5036.14 12891.65,5055.47 12941.65,5055.47 12950.43,5064.26 12950.43,5102.2 U2.5
NetR39_1: R39.1 U2.16 | length 187.5
  Bottom Layer w10: R39.1 12646.24,5474.39 12672.41,5474.39 12700,5446.8 12718.12,5446.8 12745.71,5419.21 12745.71,5381.26 U2.16
NetR40_1: R40.1 U2.15 | length 230.8
  Bottom Layer w10: R40.1 12554.86,5492.68 12602.99,5444.55 12673.97,5444.55 12692.24,5426.27 12699.71,5426.27 12721.85,5404.13 U2.15
PA0: P3.10
PA1: P3.11
PA2: P3.12
PA3: P3.13
PA4: P3.14 P12.7 | length 726.7
  Top Layer w10: v1(10738.23,5837.8) 10729.61,5846.42 10729.61,6225.65 10784.31,6280.35 10821.2,6280.35 10858.23,6243.33 10895.26,6243.33 P3.14
  Bottom Layer w10: P12.7 10733.11,5832.68 v1(10738.23,5837.8)
PA5: C5.2 P3.15 R2.1 R3.2 | length 1905.4
  Top Layer w10: v1(10720.08,5236.22) 10720.08,5166.93 v1(10762.6,5124.41) ; v1(10741.73,5766.93) 10759.64,5784.83 10759.64,5793.12 10758.23,5794.53 10758.23,5846.08 10749.61,5854.7 10749.61,6045.65 10795.26,6091.3 10795.26,6128.33 P3.15 ; v1(10770.08,4966.93) 10768.9,4965.75 10768.9,4790.39 10847.72,4711.57 10847.72,4709.07 10865.22,4691.57 R2.1
  Top Layer w20: R2.1 10870.22,4691.57 10944.43,4617.36 R3.2 11085.04,4616.57 11190.55,4616.57 C5.2
  Bottom Layer w10: v1(10720.08,5236.22) 10720.08,5745.28 v1(10741.73,5766.93) ; v1(10762.6,5124.41) 10770.08,5116.93 v1(10770.08,4966.93)
PA6: P3.16 P8.3 | length 2088.5
  Top Layer w10: P3.16 10908.64,6129.94 10947.28,6129.94 10974.8,6102.42 10974.8,5991.34 11005.51,5960.63 11075.59,5960.63 11115.75,5920.47 11115.75,5404.33 11184.25,5335.83 12043.7,5335.83 12111.02,5268.5 P8.3
PA7: P3.17 P9.3 | length 2431
  Top Layer w10: P3.17 10848.23,6081.3 10848.23,6144.27 10884.31,6180.35 10925.16,6180.35 11002.36,6103.15 11002.36,6001.97 11023.62,5980.71 11091.34,5980.71 11150.79,5921.26 11150.79,5428.74 11206.69,5372.83 12070.08,5372.83 12181.89,5261.02 12181.89,5138.98 12203.15,5117.72 P9.3
PA8: P4.23 P6.3 | length 1058.3
  Bottom Layer w10: P6.3 11845.94,5182.28 12144.09,5182.28 12183.86,5222.05 12183.86,5529.11 12237.46,5582.72 12271.69,5582.72 12307.09,5618.11 12307.09,5687.01 P4.23
PA9: P4.22
PA10: P4.21
PA11: P4.20 P5.3 | length 1441.4
  Bottom Layer w10: P5.3 11608.43,5205.28 11629.13,5225.98 12110.63,5225.98 12149.21,5264.57 12149.21,5549.21 12211.38,5611.38 12211.38,5756.63 12243.72,5788.98 12288.58,5788.98 12311.38,5811.77 12311.38,5893.66 P4.20
PA12: P4.19 P7.3 | length 1013
  Top Layer w10: v1(12047.24,5153.15) 12050,5155.91 v1(12050,5248.43)
  Bottom Layer w10: P7.3 11986.81,5153.15 v1(12047.24,5153.15) ; v1(12050,5248.43) 12095.75,5248.43 12127.56,5280.24 12127.56,5583.15 12178.58,5634.18 12178.58,5823.84 12248.41,5893.66 12248.41,5930.69 P4.19
PA13: P4.18
PA14: P4.15
PA15: P4.14
PB0: P3.20
PB1: P3.21 P20.5 | length 3097.9
  Top Layer w10: P3.21 10802.76,5840.08 10853.98,5891.3 10961.61,5891.3 10966.38,5896.06 11074.02,5896.06 11089.37,5880.71 11089.37,5349.21 11144.88,5293.7 11982.68,5293.7 12027.24,5249.13 12027.24,5088.11 v1(12029.92,5085.43)
  Bottom Layer w10: v1(12029.92,5085.43) 12029.92,4914.57 12074.06,4870.43 12146.76,4870.43 12147.2,4870.87 12212.2,4870.87 12232.99,4850.08 12510.55,4850.08 12524.02,4836.61 12524.02,4728.35 12618.07,4634.29 12773.19,4634.29 P20.5
PB3: P4.9
PB4: P4.8 Q3.1 R30.1 | length 690.1
  Top Layer w10: P4.8 12539.76,6538.19 v1(12592.52,6590.94) ; v1(12665.94,6592.52) 12680.67,6577.8 R30.1
  Top Layer w20: R30.1 12794.17,6577.87 13017.25,6577.87 Q3.1
  Bottom Layer w10: v1(12592.52,6590.94) 12664.37,6590.94 v1(12665.94,6592.52)
PB5: P4.7 Q4.1 R31.1 | length 1037.9
  Top Layer w10: P4.7 12300.76,6493.34 12525.95,6493.34 12561.42,6457.87 12561.42,6218.11 v1(12564.57,6214.96) ; v1(12650.39,6211.42) 12651.34,6210.47 R31.1
  Top Layer w20: R31.1 12794.41,6210.16 13017.01,6210.16 Q4.1
  Bottom Layer w10: v1(12564.57,6214.96) 12646.85,6214.96 v1(12650.39,6211.42)
PB6: P4.6 Q5.1 R32.1 | length 1314
  Top Layer w10: P4.6 12573.56,6638.19 12612.8,6598.95 12612.8,6058.46 12667.72,6003.54 12764.17,6003.54 12781.5,5986.22 12781.5,5927.4 R32.1
  Top Layer w20: R32.1 12796.38,5912.52 13015.04,5912.52 Q5.1
PB7: P4.5 Q6.1 R33.1 | length 1895.2
  Top Layer w10: P4.5 12264.66,6629.43 12264.66,6593.66 12307.87,6550.45 v1(12307.87,6527.95) ; v1(12494.88,6035.04) 12494.88,5828.74 12547.24,5776.38 12547.24,5770.87 12580.32,5737.8 12918.11,5737.8 12995.75,5660.16 12995.75,5569.02 13004.53,5560.24 Q6.1
  Top Layer w20: R33.1 12795.16,5559.17 13014.29,5559.17 Q6.1
  Bottom Layer w10: v1(12307.87,6527.95) 12311.38,6524.45 12311.38,6519.75 12339.78,6491.34 12470.08,6491.34 12491.34,6470.08 12491.34,6038.58 v1(12494.88,6035.04)
PB8: P4.4
PB9: P4.3
PB10: P3.22 P10.2 | length 2514.4
  Top Layer w10: P3.22 10967.24,5835.83 10967.83,5836.41 11009.65,5836.41 11035.83,5810.24 11035.83,5278.74 11083.46,5231.1 11807.48,5231.1 11859.06,5179.53 v1(11859.06,5081.5)
  Bottom Layer w10: v1(11859.06,5081.5) 11859.06,4878.35 11898.82,4838.58 12168.44,4838.58 12310.37,4696.65 P10.2
PB11: P3.23 P10.3 | length 2444.4
  Top Layer w10: P3.23 10810.25,5728.33 10847.28,5728.33 10885.26,5690.36 10911.2,5690.36 10955.91,5645.65 10955.91,5255.51 11021.65,5189.76 11644.49,5189.76 11699.61,5134.65 v1(11699.61,5079.92) ; v1(12176.38,4802.36) 12182.09,4796.65 P10.3
  Bottom Layer w10: v1(11699.61,5079.92) 11699.61,4840.16 11735.43,4804.33 12174.41,4804.33 v1(12176.38,4802.36)
PB12: P3.24 P11.3 | length 2469.4
  Top Layer w10: P3.24 10999.61,5638.98 10999.61,5276.77 11066.54,5209.84 11746.32,5209.84 11836.22,5119.94 11836.22,5067.28 11842.08,5061.42 v1(12180.71,5061.42) ; v1(12358.27,4870.08) 12387.17,4841.18 12596.61,4841.18 P11.3
  Bottom Layer w10: v1(12180.71,5061.42) 12180.71,4995.28 12203.94,4972.05 12340.55,4972.05 12359.64,4952.96 12359.64,4912.2 12358.27,4910.84 v1(12358.27,4870.08)
PB13: P4.30 P11.2 | length 944.2
  Top Layer w10: P4.30 12355.91,5009.84 12382.68,4983.07 12510.24,4983.07 v1(12537.01,4956.3)
  Bottom Layer w10: v1(12537.01,4956.3) 12587.83,4905.48 12587.83,4749.97 P11.2
PB14: P4.29
PB15: P4.28
PC0: P3.6
PC1: P3.7 P12.2 | length 410.1
  Top Layer w10: P12.2 10574.76,6377.2 10574.76,6468.42 10642.17,6535.83 P3.7
PC2: P3.8 P12.1 | length 326.2
  Top Layer w10: P12.1 10736.63,6432.68 10784.31,6480.35 10847.28,6480.35 P3.8
PC3: P3.9 P12.6 | length 592.1
  Top Layer w10: v1(10700.79,6172.99) 10700.79,6355.91 10729.13,6384.25 10751.18,6384.25 P3.9
  Bottom Layer w10: P12.6 10700.79,6014.17 v1(10700.79,6172.99)
PC4: P3.18
PC5: P3.19
PC6: P4.27
PC7: P4.26
PC8: P4.25
PC9: P4.24
PC10: P4.13
PC11: P4.12
PC12: P4.11
PC13: P3.3
PC14: P3.4
PC15: P3.5
PD2: P4.10
RAD-RX: CN1.4 P20.4 R37.1 | length 423.7
  Top Layer w20: v3(12780.71,5011.81) 12780.71,4957.48 CN1.4
  Bottom Layer w20: CN1.4 12836.22,4671.26 P20.4
RAD-TX: CN1.3 P20.3 R35.1 | length 419.1
  Top Layer w20: CN1.3 12914.96,4911.47 12946.46,4942.97 12946.46,5005.91 12947.72,5007.17 v3(12947.72,5007.87)
  Bottom Layer w20: CN1.3 12914.96,4692.52 P20.3
RADAR_5V: C16.2 C17.2 C18.2 C19.1 C31.2 C32.2 C51.2 C52.2 CN1.1 L1.2 P20.1 R5.2 R6.2 R15.2 R34.2 | length 5284.7
  Top Layer w20: v3(12088.19,6122.05) 12202,6122.05 12236.34,6087.72 12529.61,6087.72 v5(12579.53,6037.8)
  Top Layer w30: v5(12579.53,6037.8) 12579.53,5972.05 v5(12661.02,5890.55) ; v5(12709.06,5676.38) 12436.61,5403.94 12436.61,5348.03 ; R6.2 12718.37,5103.58 12692.13,5077.34 12692.13,5060.88 12674.55,5043.31 12549,5043.31 12489.11,5103.19 R15.2 12484.11,5103.19 12456.61,5130.69 12451.26,5130.69 12436.61,5145.33 12436.61,5348.03 ; C19.1 13128.74,5227.56 13124.02,5227.56 13116.38,5235.2 13116.38,5349.37 13085.43,5380.31 12727.56,5380.31 12726.77,5379.53 12468.11,5379.53 12436.61,5348.03
  Top Layer w50: CN1.1 13072.44,5134.45 13126.38,5188.39 13126.38,5225.2 C19.1@13128.74,5227.56
  Bottom Layer w10: C51.2 C51.2@13043.27,4806.26
  Bottom Layer w20: C32.2 11947.83,6565.59 12021.85,6565.59 C31.2 12024.94,6566.18 12037.44,6553.68 12037.44,6551.18 12088.19,6500.43 v3(12088.19,6122.05) ; C16.2 12688.15,5849.61 12688.15,5760.24 C17.2 12688.94,5756.95 12730.03,5715.86 12741.56,5704.33 12888.19,5704.33 12901.57,5690.94 R34.2
  Bottom Layer w30: v5(12579.53,6037.8) 12579.53,6043.84 12597.1,6061.42 L1.2 12810.83,6061.42 12840.75,6091.34 12840.75,6170.2 12855.39,6184.84 13019.67,6184.84 13051.61,6152.89 R5.2 ; v5(12661.02,5890.55) 12661.02,5879.23 12687.36,5852.89 C16.2 ; v5(12709.06,5676.38) 12709.06,5694.88 12730.03,5715.86 ; C51.2@13043.27,4806.26 13101.73,4806.26
  Bottom Layer w50: CN1.1 13072.44,4835.55 13101.73,4806.26 C52.2@13131.87,4806.26 ; C52.2@13133.86,4808.25 C18.2@13223.2,4808.25 ; P20.1 13180.32,4627.17 13270.08,4627.17 13308.27,4665.35 13308.27,4778.94 13278.98,4808.23 C18.2
USB_5V: C29.2 C30.2 J1.1 L2.2 R14.2 | length 2252.2
  Top Layer w50: J1.1 10396.06,5833.07 v4(10396.85,5833.86)
  Bottom Layer w20: v4(10396.85,5833.86) 10446.14,5883.15 10780.04,5883.15 10782.24,5885.35 11138.11,5885.35 11142.92,5890.17
  Bottom Layer w50: C29.2 11194.09,5718.15 C30.2 11190.59,5842.5 11142.92,5890.17 11106.91,5926.18 11106.91,6084.43 L2.2 11091.73,6505.51 11124.8,6538.58 11506.65,6538.58 R14.2
"VCC 5V": C1.1 C2.1 C3.1 C4.1 C6.2 C7.2 C8.2 C9.2 C10.2 C11.2 C12.2 C13.2 MP1584.5 MP1584.6 P3.1 P3.2 P4.1 P4.2 P5.2 P6.2 P7.2 P8.2 P9.2 P10.1 P11.1 P15.1 P16.1 P17.1 P18.1 | length 9529.6
  Top Layer w50: P3.1 P3.2 10903.94,6837.01 12254.72,6837.01 P4.1 P4.2 12356.3,6838.58 12356.3,7029.13 12393.31,7066.14 13338.19,7066.14 13379.13,7025.2 13379.13,6465.75 ; C4.1 10981.1,4928.5 C3.1 11076.12,4929.29 C2.1 11172.44,4929.68 C1.1 11374.65,4928.5 11403.94,4899.21 11403.94,4802.94 11399.83,4798.83 11399.83,4696.13 MP1584.6 MP1584.5 11554.71,4594.21 C6.2 C7.2 C8.2 C9.2 C10.2 C11.2 C12.2 C13.2 12263.84,4621.3 12288.48,4596.65 P10.1 12641.14,4596.65 P11.1 ; P5.2 P6.2 P7.2 11948.52,5014.86 12110.93,5014.86 P8.2 12112.4,5016.34 12276.18,5016.34 P9.2 ; P17.1 13377.56,5796.85 13379.13,5795.28 ; P18.1 13347.24,5477.95 13379.13,5509.84 13379.13,5795.28 ; P16.1 13378.35,6125.59 13379.13,6124.8 ; P15.1 13377.95,6464.57 13379.13,6465.75 ; 13379.13,5795.28 13379.13,6124.8 ; 13379.13,6124.8 13379.13,6465.75
  Bottom Layer w30: P9.2 12645.54,5017.72 12704.2,4959.06 13216.93,4959.06 13258.27,5000.39 13258.27,5470.08 P18.1
  Bottom Layer w50: MP1584.6 11498.98,4795.28 11498.98,4913.87 11598.14,5013.03 11606.69,5013.03 P5.2
"VCC 7.4V": MP1584.3 MP1584.4 R2.2 S2.1 | length 599.2
  Top Layer w50: MP1584.4 10845.35,4594.21 R2.2
  Top Layer w100: S2.1 10638.35,4628.78 MP1584.4 MP1584.3
VIN: D1.2 F1.1 P2.1 | length 596.3
  Top Layer w100: P2.1 10087.01,7317.72 10179.92,7224.8 F1.1 10317.56,7145.44 10317.56,7102.71 10458.98,6961.29 D1.2
XTAL0: C53.1 U2.27 X3.3 | length 625.3
  Top Layer w10: v1(12670.64,5306.06) 12675.17,5310.59 13016.57,5310.59 v1(13024.64,5302.53)
  Bottom Layer w10: C53.1 12617.56,5271 12652.61,5306.06 v1(12670.64,5306.06) ; X3.3 12981.68,5473.23 13027.2,5427.71 13027.2,5381.26 U2.27 13028.94,5306.83 v1(13024.64,5302.53)
XTAL1: C55.1 U2.28 X3.1 | length 949.8
  Top Layer w10: v1(12671.06,5286.06) 12759.21,5286.06 12763.74,5290.59 12889.33,5290.59 12902.36,5277.56 v1(13027.95,5277.56) ; v1(13096.06,5444.49) 13137.01,5444.49 13142.91,5450.39 13142.91,5551.18 13131.69,5562.4 13106.89,5562.4 v3(13106.69,5562.6)
  Bottom Layer w10: C55.1 12620.87,5181.24 12669.49,5229.86 12669.49,5258.78 12671.06,5260.36 v1(12671.06,5286.06) ; v1(13027.95,5277.56) 13054.53,5304.13 U2.28 13054.53,5404.13 13058.39,5407.99 13083.58,5407.99 13096.06,5420.47 v1(13096.06,5444.49)
  Bottom Layer w20: X3.1 13105.51,5563.78 v3(13106.69,5562.6)
pads on no net: IC2.3 IC4.3 J1.2 J1.3 J1.MH1 J1.MH2 J2.MH1 J2.MH2 P12.3 P12.8 P12.9 S1.3 S2.3 U2.2 U2.3 U2.6 U2.8 U2.9 U2.10 U2.11 U2.12 U2.13 U2.14 U2.22 U2.23 U2.24

## Silkscreen, mask and mechanical layers (free items; w line width, h text height)
Mechanical 1:
  lines w10: 9582.58,7244.12 9582.58,4715.48 ccw(c9795.28,4718.5) 9795.28,4505.78 9796.44,4504.62 13242.4,4504.62 ccw(c13239.37,4717.32) 13452.09,4717.32 ; 9583.34,7244.88 cw(c9796.06,7244.88) 9793.03,7457.58 13238.21,7457.58 ; 13238.58,7457.21 cw(c13238.58,7244.49) 13451.28,7247.52 13451.28,4718.13

## Text inside footprints (layer, text, board x,y; h text height)
MP1584: Top Overlay "OUT" at 11272.91,4819.21 h60; Top Overlay "IN" at 10642.91,4824.21 h60
P3: Top Overlay "30" at 10882.76,5375.83 h50 r270; Top Overlay "29" at 10782.76,5375.83 h50 r270; Top Overlay "2" at 10882.76,6935.83 h50 r270; Top Overlay "1" at 10782.76,6935.83 h50 r270
P4: Top Overlay "1" at 12235.91,6938.19 h50 r270; Top Overlay "2" at 12335.91,6938.19 h50 r270; Top Overlay "29" at 12235.91,5378.19 h50 r270; Top Overlay "30" at 12335.91,5378.19 h50 r270